# Altium PCB BPC_Clock.PcbDoc
Units mm, origin at the board's own origin, x right, y up, seen from the top; angles counter-clockwise.
Board outline 121.48 x 55.58 mm, 2 copper layers (Top Layer, Bottom Layer); 58 components, 97 nets, 349 pads, 138 vias.
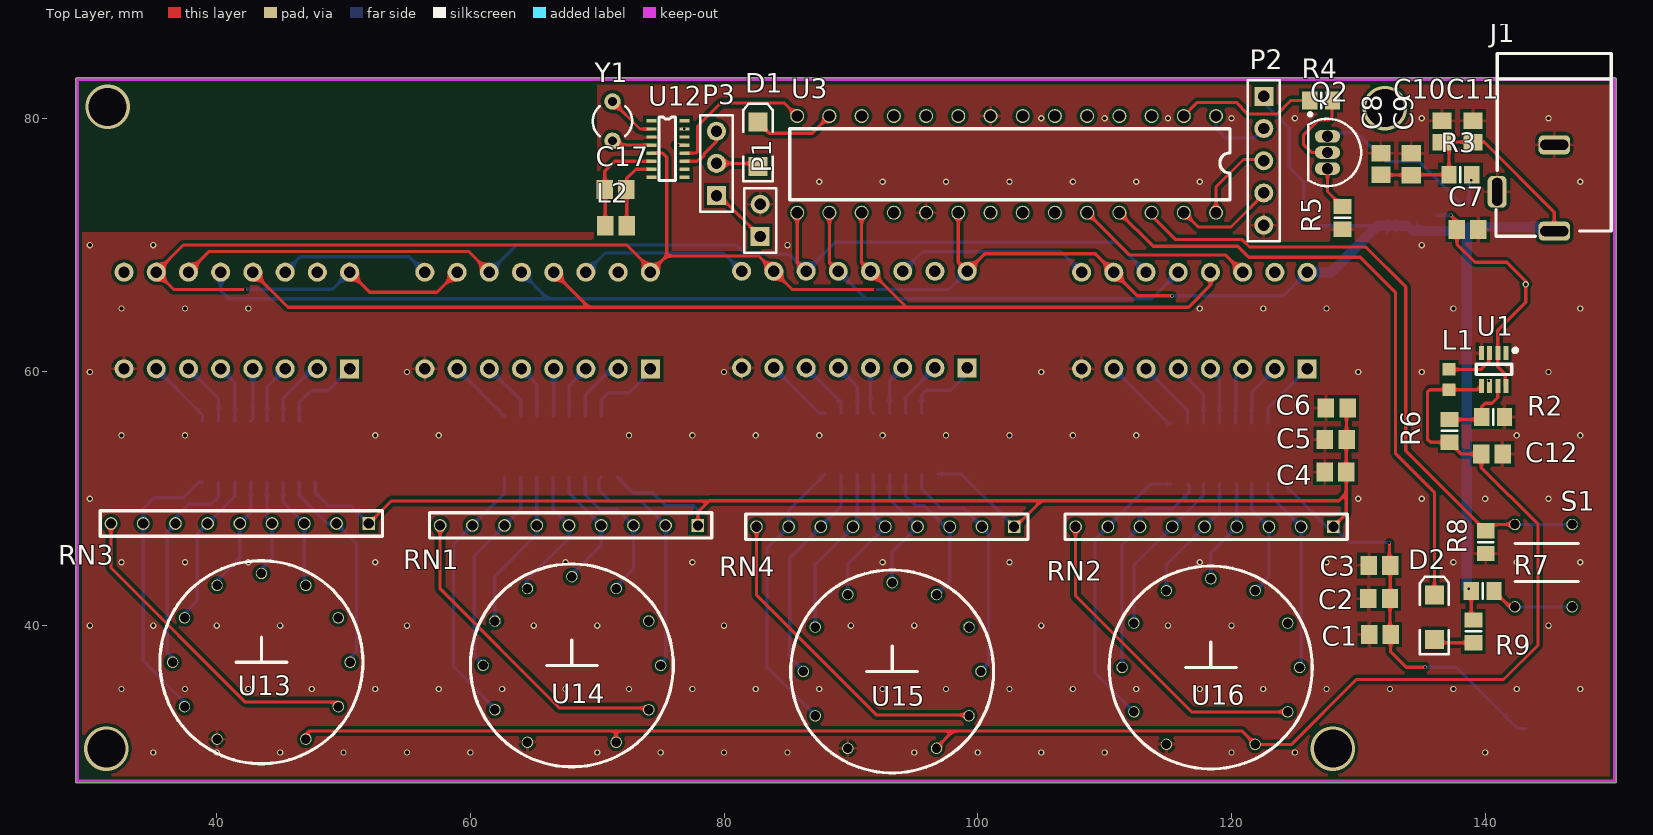
[diagram p0: Top Layer view]
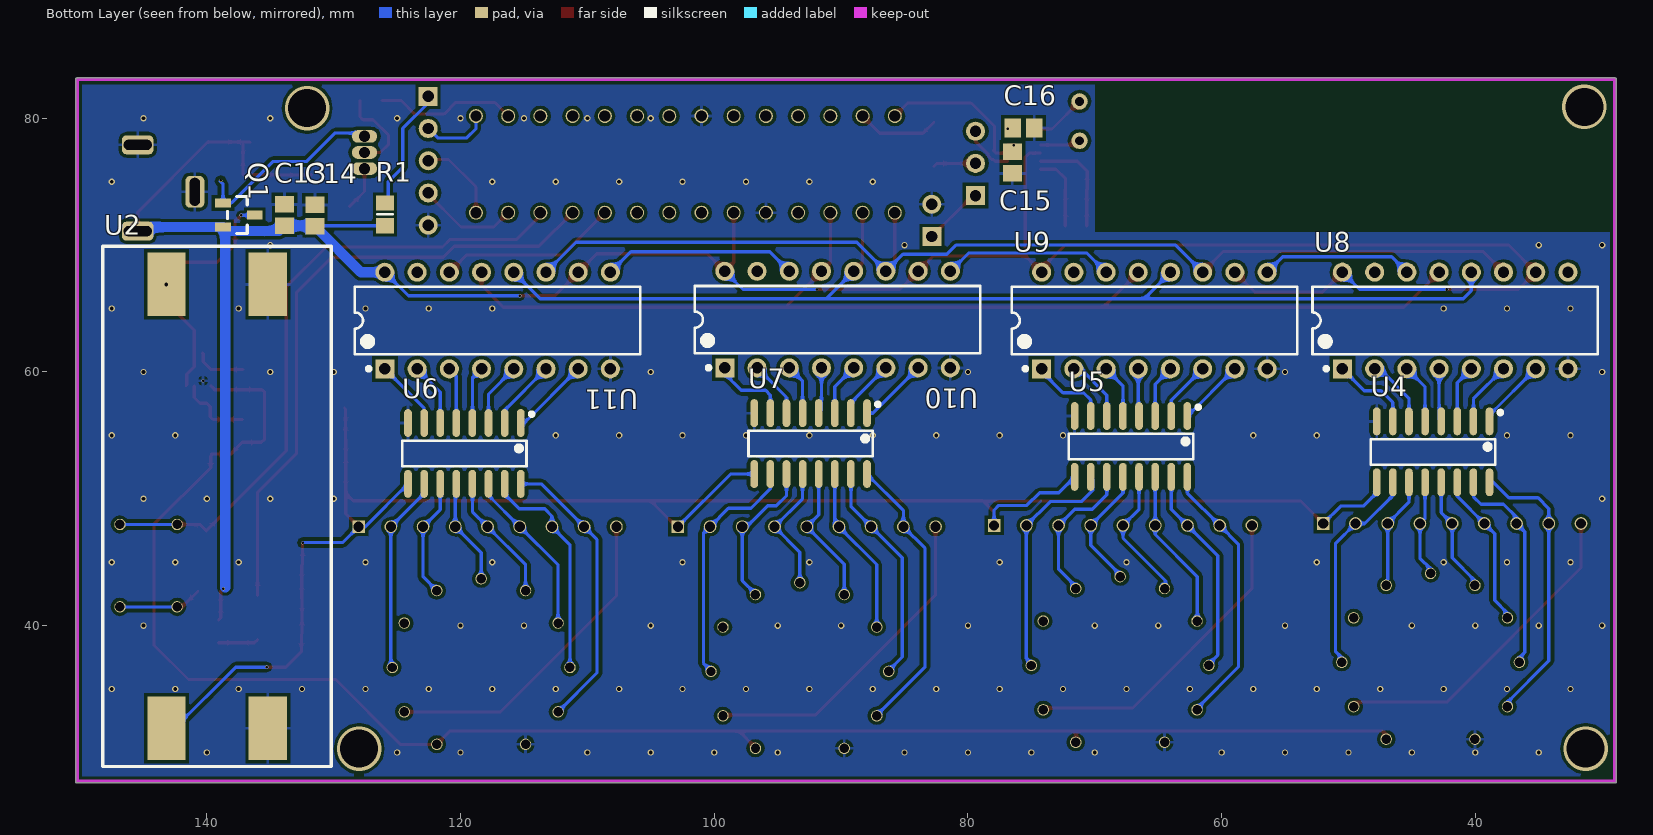
[diagram p1: Bottom Layer view, seen from below]

## Layer stack, top to bottom
Top Solder: solder mask 0.0102, Solder Resist, Dk 3.5
Top Layer: signal copper 0.0356
Dielectric 1: dielectric 0.32, FR-4, Dk 4.8
Bottom Layer: signal copper 0.0356
Bottom Solder: solder mask 0.0102, Solder Resist, Dk 3.5

## Board outline
28.873,27.725 ccw(c29,27.725) 29,27.598 150.225,27.598 ccw(c150.225,27.725) 150.352,27.725 150.352,83.05 ccw(c150.225,83.05) 150.187,83.172 ccw(c150.15,83.05) 150.15,83.177 29,83.177 ccw(c29,83.05) 28.873,83.05

## Design rules (kind name [scope] priority, off if disabled: settings)
Clearance [All] p1: gap=0.254
HoleToHoleClearance [All] p1: gap=0.1 allowstackedmicrovias=TRUE
MinimumSolderMaskSliver [All] p1: minsoldermaskwidth=0.01
PolygonConnect [All] p1: connectstyle=Relief reliefconductorwidth=0.254 reliefentries=4 polygonreliefangle="90 Angle" airgapwidth=0.254
RoomDefinition BPC_Clock [InComponentClass('BPC_Clock')] p1: confinementstyle=ConfineIn formatcopy=TRUE lockcomponents=FALSE outline 18.415,17.145 192.913,17.145 192.913,137.414 18.415,137.414
RoutingVias [All] p1: holewidth=0.711 width=1.27 viastyle="Through Hole" minholewidth=0.711 minwidth=1.27 maxholewidth=0.711 maxwidth=1.27
SilkToSilkClearance [All] p1: silktosilkclearance=0.01
SilkToSolderMaskClearance [IsPad] p1: minsilkscreentomaskgap=0.01 clearancetoexposedcopper=TRUE
SolderMaskExpansion [All] p1: expansion=0.102
Width [All] p1: maxlimit=0.8 minlimit=0.254 preferedwidth=0.254
26 further rules are at their usual default settings.

## Components (designator, comment, footprint, x,y, rotation, side; value= is the part's Value field where it differs from the comment)
C1 "Cap" CAPC2012N 131.7,39.3 r180 top
C2 "Cap" CAPC2012N 131.65,42.125 r180 top
C3 "Cap" CAPC2012N 131.675,44.75 r180 top
C4 "Cap" CAPC2012N 128.2,52.1 r180 top
C5 "Cap" CAPC2012N 128.225,54.675 r180 top
C6 "Cap" CAPC2012N 128.3,57.15 r180 top
C7 "Cap" CAPC2012N 138.625,71.225 r0 top
C8 "Cap" CAPC2012N 131.775,76.4 r90 top
C9 "Cap" CAPC2012N 134.175,76.375 r90 top
C10 "Cap" CAPC2012N 136.6,78.95 r90 top
C11 "Cap" CAPC2012N 139.05,78.95 r90 top
C12 "Cap" CAPC2012N 140.525,53.525 r0 top
C13 "Cap" CAPC2012N 133.875,72.375 r90 bottom
C14 "Cap" CAPC2012N 131.475,72.325 r90 bottom
C15 "Cap" CAPC2012N 76.5,76.5 r270 bottom
C16 "Cap" CAPC2012N 75.625,79.225 r180 bottom
C17 "Cap" CAPC2012N 71.45,74.4 r180 top
D1 "LED2" DSO-F2/D6.1 82.675,77.95 r90 top
D2 "LED State" DSO-F2/D6.1 136,40.65 r90 top
J1 "DC" DC 145.45,71.1 r90 top
L1 "Chip inductors" CAPC1608N 137.15,59.4 r90 top
L2 "Antenna" CAPC2012N 71.475,71.525 r180 top
P1 "Test code" HDR1X2 82.85,70.675 r90 top
P2 "Header 5" HDR1X5 122.55,81.73 r270 top
P3 "Jumper" HDR1X3 79.4,73.9 r90 top
Q1 "3415" LC-SOT-23(SOT-23-3) 137.475,72.375 r0 bottom
Q2 "NPN" BCY-W3 127.575,77.3 r180 top
R1 "0" "RES 0805N (2012)" 125.95,72.425 r270 bottom
R2 "80k" "RES 0805N (2012)" 140.625,56.45 r180 top
R3 "100k" "RES 0805N (2012)" 138.05,75.55 r0 top
R4 "10k" "RES 0805N (2012)" 127.075,81.4 r0 top
R5 "10k" "RES 0805N (2012)" 128.75,72.15 r90 top
R6 "120k" "RES 0805N (2012)" 137.2,55.35 r270 top
R7 "1k" "RES 0805N (2012)" 139.8,42.725 r180 top
R8 "2k" "RES 0805N (2012)" 140.05,46.575 r90 top
R9 "1k" "RES 0805N (2012)" 139.075,39.55 r90 top
RN1 "RN-9P" RN-9P 67.775,47.9 r270 top
RN2 "RN-9P" RN-9P 117.875,47.8 r270 top
RN3 "RN-9P" RN-9P 41.825,48.05 r270 top
RN4 "RN-9P" RN-9P 92.71,47.8 r270 top
S1 "Syn_button" sw 142.35,41.475 r90 top
U1 "MP2161" LC-TSOT-23-8 140.675,60.2 r180 top
U2 "MT3608" MT3608 143.2,31.9 r90 bottom
U3 "PIC16F1786" PIC-28 118.785,80.175 r270 top
U4 "ULN2003" LC-SOP-16_150mil 43.325,53.7 r0 bottom
U5 "ULN2003" LC-SOP-16_150mil 67.145,54.125 r0 bottom
U6 "ULN2003" LC-SOP-16_150mil 119.7,53.575 r0 bottom
U7 "ULN2003" LC-SOP-16_150mil 92.4,54.35 r0 bottom
U8 "74HC595" LC-DIP-16 41.584,64.058 r90 bottom
U9 "74HC595" LC-DIP-16 65.3,64.05 r90 bottom
U10 "74HC595" LC-DIP-16 90.275,64.125 r90 bottom
U11 "74HC595" LC-DIP-16 117.075,64.05 r90 bottom
U12 "CME6005" CME6005 74.275,79.79 r0 top
U13 "VFD" IV-11 43.525,37.112 r0 top
U14 "VFD" IV-11 68,36.862 r0 top
U15 "VFD" IV-11 93.25,36.387 r0 top
U16 "VFD" IV-11 118.375,36.7 r0 top
Y1 "XTAL" BCY-W2/D3.1 71.2,79.775 r0 top

## Footprints (in the part's own frame and the unit in brackets; to place one, negate y for a bottom-side part, rotate by r counter-clockwise, add the part's x,y. Pads: shape width x height; smd on the part's side, far side on the other; paste and mask are expansions set on the pad)
BCY-W2/D3.1 [mm] "Crystal, Thru-Hole; 2 Leads; Body 3.1 x 8.2 mm (Dia.xH)"
  round 1.3 hole 0.7: 1(0,1.55) 2(0,-1.55)
  silkscreen extent -1.55,-1.19 1.55,1.17
BCY-W3 [mm] "TO, Flat Index; 3 In-Line, Axial Leads; Body Dia. 4.8mm; Leads 0.55 x 0.51 mm (max)"
  oval 2x1 hole 0.9: 1(0,-1.27) 2(0,0) 3(0,1.27)
  silkscreen extent -2.65,-3.13 1.52,2.65, body extent -2.65,-2.66 1.52,2.66, height 5.33
CAPC1608N [mm] "Chip Capacitor, Body 1.6x0.8mm, IPC Medium Density"
  rect 1x1 smd: 1(-0.8,0) 2(0.8,0)
  body extent -0.87,-0.48 0.87,0.48, height 0.85
CAPC2012N [mm] "Chip Capacitor, Body 2.0x1.3mm, IPC Medium Density"
  rect 1.3x1.5 smd: 1(-0.85,0) 2(0.85,0)
  body extent -1.1,-0.72 1.1,0.72, height 1.1
CME6005 [mm]
  rect 0.8x0.27 smd: 1(0,0) 2(0,-0.635) 3(0,-1.27) 4(0,-1.905) 5(0,-2.54) 6(0,-3.175) 7(0,-3.81) 8(0,-4.445) 9(2.6,-4.445) 10(2.6,-3.81) 11(2.6,-3.175) 12(2.6,-2.54) 13(2.6,-1.905) 14(2.6,-1.27) 15(2.6,-0.635) 16(2.6,0)
  silkscreen extent 0.6,-4.7 1.9,0.3
DC [mm]
  rrect50% 1.5x2.5 hole 0.8 slot 2.2 at 90 deg: 1(0,0) 2(6.8,0)
  rrect50% 2.5x1.5 hole 0.8 slot 2.2 at 0 deg: 3(3.1,4.5)
  silkscreen extent -0.4,-4.5 14,4.6
DSO-F2/D6.1 [mm] "SMT LED; 2 Flat Leads"
  rect 1.5x1.5 smd: 1(-1.75,0) 2(1.75,0)
  silkscreen extent -2.9,-1.15 3.2,1.15
HDR1X2 [mm] "Connector; Header; 2 Position"
  rect 1.5x1.5 hole 0.9: 1(0,0)
  round 1.5 hole 0.9: 2(2.54,0)
  silkscreen extent -1.27,-1.27 3.81,1.27
HDR1X3 [mm] "Connector; Header; 3 Position"
  rect 1.5x1.5 hole 0.9: 1(0,0)
  round 1.5 hole 0.9: 2(2.54,0) 3(5.08,0)
  silkscreen extent -1.27,-1.27 6.35,1.27
HDR1X5 [mm] "Connector; Header; 5 Position"
  rect 1.5x1.5 hole 0.9: 1(0,0)
  round 1.5 hole 0.9: 2(2.54,0) 3(5.08,0) 4(7.62,0) 5(10.16,0)
  silkscreen extent -1.27,-1.27 11.43,1.27
IV-11 [mm]
  round 0.9 hole 0.73: 1(3.5,-6.062) 2(6.062,-3.5) 3(7,0)
  round 0.9 hole 0.75: 4(6.062,3.5) 5(3.5,6.062) 6(0,7) 7(-3.5,6.062) 8(-6.062,3.5) 9(-7,0) 10(-6.062,-3.5) 11(-3.5,-6.062)
  silkscreen extent -8,-8 8,8
LC-DIP-16 [mm]
  rect 1.5x1.5 hole 0.9: 1(-3.81,8.89)
  round 1.5 hole 0.9: 2(-3.81,6.35) 3(-3.81,3.81) 4(-3.81,1.27) 5(-3.81,-1.27) 6(-3.81,-3.81) 7(-3.81,-6.35) 8(-3.81,-8.89) 9(3.81,-8.89) 10(3.81,-6.35) 11(3.81,-3.81) 12(3.81,-1.27) 13(3.81,1.27) 14(3.81,3.81) 15(3.81,6.35) 16(3.81,8.89)
  silkscreen extent -3.95,-11.25 2.65,11.25
LC-SOP-16_150mil [mm]
  oval 0.6x2.2 smd: 1(-4.445,-2.4) 2(-3.175,-2.4) 3(-1.905,-2.4) 4(-0.635,-2.4) 5(0.635,-2.4) 6(1.905,-2.4) 7(3.175,-2.4) 8(4.445,-2.4) 9(4.445,2.4) 10(3.175,2.4) 11(1.905,2.4) 12(0.635,2.4) 13(-0.635,2.4) 14(-1.905,2.4) 15(-3.175,2.4) 16(-4.445,2.4)
  silkscreen extent -5.45,-3.25 4.9,1
LC-SOT-23(SOT-23-3) [mm]
  rect 1.25x0.7 smd: 1(1.25,-0.95) 2(-1.25,0) 3(1.25,0.95)
  silkscreen extent -0.65,-1.46 0.9,1.46, body extent -1.5,-1.5 1.5,1.5, height 1.3
LC-TSOT-23-8 [mm]
  rect 0.4x1.1 smd mask+0.051: 1(-0.975,-1.3) 2(-0.325,-1.3) 3(0.325,-1.3) 4(0.975,-1.3) 5(0.975,1.3) 6(0.325,1.3) 7(-0.325,1.3) 8(-0.975,1.3)
  silkscreen extent -1.85,-1.65 1.38,0.4
MT3608 [mm]
  rect 5x3 smd: 1(0,0) 2(0,-8) 3(35,0) 4(35,-8)
  silkscreen extent -3,-13 38,5
PIC-28 [mm]
  round 1.1 hole 0.9: 1(0,0) 2(0,-2.54) 3(0,-5.08) 4(0,-7.62) 5(0,-10.16) 6(0,-12.7) 7(0,-15.24) 8(0,-17.78) 9(0,-20.32) 10(0,-22.86) 11(0,-25.4) 12(0,-27.94) 13(0,-30.48) 14(0,-33.02) 15(7.62,-33.02) 16(7.62,-30.48) 17(7.62,-27.94) 18(7.62,-25.4) 19(7.62,-22.86) 20(7.62,-20.32) 21(7.62,-17.78) 22(7.62,-15.24) 23(7.62,-12.7) 24(7.62,-10.16) 25(7.62,-7.62) 26(7.62,-5.08) 27(7.62,-2.54) 28(7.62,0)
  silkscreen extent 1,-33.6 6.6,1.1
"RES 0805N (2012)" [mm] "Chip Resistor, Body 2.0x1.2mm, IPC Medium Density"
  rect 1.2x1.4 smd: 1(-0.9,0) 2(0.9,0)
  silkscreen extent 0,-0.6 0,0.6, body extent -1,-0.63 1,0.63, height 0.55
RN-9P [mm]
  rect 1x1 hole 0.8: 1(0,10.16)
  round 1 hole 0.8: 2(0,7.62) 3(0,5.08) 4(0,2.54) 5(0,0) 6(0,-2.54) 7(0,-5.08) 8(0,-7.62) 9(0,-10.16)
  silkscreen extent -1,-11 1,11.25
sw [mm]
  round 0.9 hole 0.75: 1(0,0) 1(0,-4.5) 2(6.5,-4.5) 2(6.5,0)
  silkscreen extent 2,-5 5,0

## Part data
C1 C2 C3 C4 C5 C6 C7 C8 C9 C10 C11 C12 C13 C14 C15 C16 C17: "Capacitor"
D1: "Typical RED, GREEN, YELLOW, AMBER GaAs LED"
D2: library part LED2, "Typical RED, GREEN, YELLOW, AMBER GaAs LED"
L2: library part Inductor, "Inductor"
P1: library part "Header 2", "Header, 2-Pin"
P2: "Header, 5-Pin"
P3: library part "Header 3", "Header, 3-Pin"
Q1: library part PMOS-2, "P-Channel Power MOSFET"
Q2: "NPN Bipolar Transistor"
R1 R2 R3 R4 R5 R6 R7 R8 R9: library part Res1, "Resistor"
S1: library part SW-PB, "Switch"
Y1: "Crystal Oscillator"

## Via types
v1: diameter 0.5, hole 0.3, Top Layer to Bottom Layer, 123 vias
v2: diameter 0.25, hole 0.2, Top Layer to Bottom Layer, 11 vias
v3: diameter 3.5, hole 3, Top Layer to Bottom Layer, 4 vias

## Nets (pads, with @x,y where several pads share a name; then routed paths per layer and width w, separated by ;. In a path a pad name is that pad's centre, name@x,y a point inside that pad or via, vN(x,y) a via of type N, cw(c..) or ccw(c..) an arc to the next point about the centre after c; other vN are vias at no path point)
BPC_CODE: P3.3 U12.11 | length 4.1
  Top Layer w0.254: U12.11 77.864,76.615 77.991,76.742 78.103,76.742 78.408,77.047 78.408,77.159 79.4,78.151 P3.3
BPC_DATA: D1.1 P3.2 | length 3.4
  Top Layer w0.254: P3.2 82.435,76.44 D1.1
BPC_ON: U3.14 U12.12 | length 12.2
  Top Layer w0.254: U12.12 77.767,77.25 77.992,77.475 77.9,77.475 77.9,79.35 79.75,81.2 84.74,81.2 U3.14
BPC_TEST: P1.1 P3.1 | length 5.1
  Top Layer w0.254: P3.1 79.91,73.39 79.91,73.615 P1.1
GND: C1.2 C2.2 C3.2 C4.2 C5.2 C6.2 C7.2 C8.2 C9.2 C10.2 C11.2 C12.2 C13.2 C14.2 C15.2 C16.2 J1.2 J1.3 P1.2 P2.5 R2.1 R5.1 R8.1 U1.4 U1.6 U2.2 U2.4 U3.8 U3.19 U4.8 U5.8 U6.8 U7.8 U8.8 U9.8 U10.8 U11.8 U12.3 U13.11 U14.11 U15.11 U16.11
  other v1: 35,30 40,30 45,30 50,30 55,30 60,30 70,30 75,30 80,30 85,30 95,30 100,30 105,30 110,30 120,30 125,30 140,30 32.5,35 37.5,35 42.5,35 47.5,35 52.5,35 57.5,35 62.5,35 67.5,35 72.5,35 77.5,35 82.5,35 87.5,35 92.5,35 97.5,35 102.5,35 107.5,35 112.5,35 117.5,35 122.5,35 127.5,35 132.5,35 137.5,35 142.5,35 147.5,35 30,40 35,40 40,40 45,40 55,40 65,40 70,40 80,40 90,40 95,40 105,40 115,40 120,40 145,40 32.5,45 37.5,45 42.5,45 52.5,45 67.5,45 77.5,45 92.5,45 102.5,45 117.5,45 127.5,45 137.5,45 142.5,45 147.5,45 30,50 130,50 135,50 140,50 145,50 32.5,55 37.5,55 52.5,55 57.5,55 72.5,55 77.5,55 82.5,55 87.5,55 92.5,55 97.5,55 102.5,55 107.5,55 112.5,55 142.5,55 147.5,55 30,60 55,60 80,60 105,60 130,60 135,60 145,60 32.5,65 37.5,65 42.5,65 117.5,65 122.5,65 127.5,65 137.5,65 147.5,65 30,70 35,70 85,70 135,70 87.5,75 92.5,75 97.5,75 102.5,75 107.5,75 112.5,75 117.5,75 147.5,75 105,80 110,80 115,80 120,80 125,80 135,80 145,80
  other v2: 140.3,59.3
LIGHT_ON: R4.1 U3.2 | length 11.2
  Top Layer w0.254: U3.2 117.32,81.25 120.375,81.25 121.3,80.325 123.6,80.325 124.675,81.4 R4.1
NetC15_1: C15.1 U12.13 | length 0.7
  Top Layer w0.254: 76.21,77.885 v2(76.4,77.885) U12.13
NetC16_1: C16.1 U12.15
  other v2: 76.875,79.155
NetC17_1: C17.1 L2.1 U12.7 | length 6
  Top Layer w0.254: L2.1 72.325,74.375 C17.1 72.3,75.225 73.055,75.98 U12.7
NetC17_2: C17.2 L2.2 U12.6 | length 8.3
  Top Layer w0.254: L2.2 70.625,74.375 C17.2 70.6,75.825 71.39,76.615 U12.6
NetD1_2: D1.2 U3.13 | length 6.6
  Top Layer w0.254: D1.2 83.55,78.825 86.955,78.825 U3.13
NetD2_1: D2.1 R9.1 | length 3.2
  Top Layer w0.254: D2.1 136.25,38.65 R9.1
NetL1_2: L1.2 U1.3 | length 4.1
  Top Layer w0.254: L1.2 139.689,60.2 140.281,60.792 140.281,61.431 U1.3
NetP2_1: P2.1 R1.1 | length 9.8
  Bottom Layer w0.254: P2.1 122.55,81.2 124.55,79.2 124.55,76.15 125.7,75 125.7,73.575 R1.1
NetQ1_1: Q1.1 Q2.1 R3.2 | length 16.1
  Bottom Layer w0.254: Q2.1@126.775,78.845 129.88,78.845 132.125,76.6 134.775,76.6 138.05,73.325 Q1.1 138.725,74.8 v2@138.975,75.05
  other v2: 138.9,75.1
NetQ2_2: Q2.2 R4.2 | length 7
  Top Layer w0.254: Q2.2 126.325,77.3 125.675,77.95 125.675,78.65 126.9,79.875 127.7,79.875 127.925,80.1 R4.2@127.925,81.4
NetQ2_3: Q2.3 R5.2 | length 3.5
  Top Layer w0.254: Q2.3 127.575,74.225 R5.2
NetR2_2: R2.2 R6.1 U1.7 | length 5.9
  Top Layer w0.254: R6.1 139.525,56.25 R2.2 139.725,57.25 140.006,57.531 140.544,57.531 141,57.987 U1.7
NetR7_1: R7.1 S1.1 | length 6.7
  Top Layer w0.254: R7.1 141.95,41.475 S1.1@142.35,41.475
  Bottom Layer w0.254: S1.1@142.35,41.475 S1.1@146.85,41.475
NetU4_1: U4.1 U8.7 | length 5.7
  Bottom Layer w0.254: U8.7 38.88,56.602 U4.1
NetU4_2: U4.2 U8.6 | length 5.1
  Bottom Layer w0.254: U8.6 40.15,57.872 U4.2
NetU4_3: U4.3 U8.5 | length 4.6
  Bottom Layer w0.254: U8.5 41.42,59.142 U4.3
NetU4_4: U4.4 U8.4 | length 4.2
  Bottom Layer w0.254: U4.4 42.854,56.264 U8.4
NetU4_5: U4.5 U8.3 | length 4.7
  Bottom Layer w0.254: U4.5 43.96,58.814 U8.3
NetU4_6: U4.6 U8.2 | length 5.5
  Bottom Layer w0.254: U4.6 45.23,57.93 47.548,60.248 U8.2
NetU4_7: U4.7 U8.1 | length 6.6
  Bottom Layer w0.254: U4.7 46.5,57.6 47.425,58.525 48.751,58.525 U8.1
NetU5_1: U5.1 U9.7 | length 5.3
  Bottom Layer w0.254: U9.7 62.665,56.525 U5.1
NetU5_2: U5.2 U9.6 | length 4.7
  Bottom Layer w0.254: U9.6 63.97,57.76 U5.2
NetU5_3: U5.3 U9.5 | length 4.2
  Bottom Layer w0.254: U9.5 65.24,59.03 U5.3
NetU5_4: U5.4 U9.4 | length 3.7
  Bottom Layer w0.254: U5.4 66.57,56.585 U9.4
NetU5_5: U5.5 U9.3 | length 4.3
  Bottom Layer w0.254: U5.5 67.78,58.91 U9.3
NetU5_6: U5.6 U9.2 | length 5.1
  Bottom Layer w0.254: U5.6 69.05,58.175 71.115,60.24 U9.2
NetU5_7: U5.7 U9.1 | length 6.2
  Bottom Layer w0.254: U5.7 70.32,57.795 70.889,58.364 72.514,58.364 U9.1@74.29,60.14
NetU6_1: U6.1 U11.7 | length 6.3
  Bottom Layer w0.254: U11.7 114.99,55.975 U6.1
NetU6_2: U6.2 U11.6 | length 5.6
  Bottom Layer w0.254: U11.6 116.525,56.98 U6.2
NetU6_3: U6.3 U11.5 | length 5.1
  Bottom Layer w0.254: U11.5 117.795,58.25 U6.3
NetU6_4: U6.4 U11.4 | length 4.6
  Bottom Layer w0.254: U11.4 119.065,59.52 U6.4
NetU6_5: U6.5 U11.3 | length 4.5
  Bottom Layer w0.254: U6.5 120.335,59.69 U11.3
NetU6_6: U6.6 U11.2 | length 5
  Bottom Layer w0.254: U6.6 121.605,58.42 U11.2
NetU6_7: U6.7 U11.1 | length 5.5
  Bottom Layer w0.254: U6.7 122.875,57.15 U11.1
NetU7_1: U7.1 U10.7 | length 5.5
  Bottom Layer w0.254: U10.7 87.49,56.75 U7.1
NetU7_2: U7.2 U10.6 | length 4.7
  Bottom Layer w0.254: U10.6 89.225,57.555 U7.2
NetU7_3: U7.3 U10.5 | length 4.2
  Bottom Layer w0.254: U10.5 90.495,58.825 U7.3
NetU7_4: U7.4 U10.4 | length 3.7
  Bottom Layer w0.254: U10.4 91.545,56.97 U7.4
NetU7_5: U7.5 U10.3 | length 4
  Bottom Layer w0.254: U7.5 93.035,59.265 U10.3
NetU7_6: U7.6 U10.2 | length 4.5
  Bottom Layer w0.254: U7.6 94.305,57.995 U10.2
NetU7_7: U7.7 U10.1 | length 6.2
  Bottom Layer w0.254: U7.7 95.575,58.175 95.95,58.55 97.875,58.55 99.165,59.84 U10.1
NetU8_14: U8.14 U9.9 | length 12
  Bottom Layer w0.254: U8.14 46.601,69.075 55.195,69.075 U9.9
NetU9_14: U9.14 U10.9 | length 13.5
  Bottom Layer w0.254: U9.14 70.625,69.375 79.945,69.375 U10.9
NetU10_14: U10.14 U11.9 | length 15.4
  Bottom Layer w0.254: U10.14 95.625,69.475 106.57,69.475 U11.9
NetU12_2: U12.2 Y1.1 | length 4
  Top Layer w0.254: Y1.1 73.37,79.155 U12.2
NetU12_4: U12.4 Y1.2 | length 3.2
  Top Layer w0.254: Y1.2 71.54,77.885 U12.4
PIC_CLK: P2.4 U3.27 | length 8.1
  Top Layer w0.254: U3.27 117.375,71.425 119.965,71.425 P2.4@122.75,74.21
PIC_DA: P2.3 U3.28 | length 6.9
  Top Layer w0.254: U3.28 118.785,74.585 120.95,76.75 P2.3@122.75,76.75
PIC_DATA: U3.24 U11.14 | length 14.2
  Top Layer w0.254: U3.24 111.955,69.225 119.52,69.225 U11.14
PIC_OE: U3.17 U8.13 U9.13 U10.13 U11.13 | length 91.2
  Top Layer w0.254: U8.13 45.622,65.1 69.33,65.1 ; U9.13 69.33,65.1 ; U3.17 90.845,68.635 U10.13 94.38,65.1 ; U11.13 118.345,66.82 116.625,65.1 94.38,65.1 ; 69.33,65.1 94.38,65.1
PIC_SHCP: U3.15 U8.11 U9.11 U10.11 U11.11 | length 85.4
  Top Layer w0.254: U8.11 39.405,69.499 59.851,69.499 U9.11 ; U3.15 85.765,68.635 U10.11
  Bottom Layer w0.254: U9.11 63.63,70 80.95,70 81.675,69.275 85.125,69.275 U10.11 88.755,70.225 110.9,70.225 U11.11
PIC_STCP: U3.16 U8.12 U9.12 U10.12 U11.12 | length 88.9
  Top Layer w0.254: U3.16 88.305,68.635 U10.12
  Bottom Layer w0.254: U8.12 40.314,66.411 40.95,65.775 66.115,65.775 ; U9.12 66.115,65.775 ; U10.12 91.133,65.808 ; U11.12 113.72,65.775 66.115,65.775
PIC_VPP: P2.2 U3.1 | length 5.4
  Bottom Layer w0.254: U3.1 118.785,79.165 119.5,78.45 121.81,78.45 P2.2
STATE: D2.2 U3.25 | length 49.5
  Top Layer w0.254: U3.25 113.82,69.9 120.5,69.9 121.35,69.05 130.15,69.05 132.925,66.275 132.925,53.575 136,50.5 D2.2
SYN: R8.2 S1.2 U3.26 | length 51.4
  Top Layer w0.254: U3.26 113.705,72.32 115.575,70.45 120.825,70.45 121.425,69.85 130.6,69.85 133.75,66.7 133.75,53.775 R8.2 140.55,47.975 S1.2@142.35,47.975
  Bottom Layer w0.254: S1.2@142.35,47.975 S1.2@146.85,47.975
VCC: C8.1 C9.1 C10.1 C11.1 C13.1 C14.1 J1.1 Q1.3 R1.2 R3.1 R7.2 R9.2 U3.20 U8.10 U8.16 U9.10 U9.16 U10.10 U10.16 U11.10 U11.16 U12.5 | length 215.9
  Top Layer w0.254: v2(42.25,66.5) 36.602,66.5 U8.10 37.373,70.007 72.318,70.007 U9.16@74.327,67.997 ; U8.16 52.067,66.275 57.365,66.275 U9.10 ; U9.16 U9.16@74.327,67.997 ; U12.5 75.15,77.25 75.475,76.925 75.475,69.145 ; v2(91.9,66.5) 85.36,66.5 U10.10 82.715,69.145 75.475,69.145 ; U3.20 98.465,68.635 U10.16 100.555,69.325 109.26,69.325 U11.10 112.585,66 v2(115.325,66) ; C8.1 131.8,75.525 C9.1 C9.1@134.475,75.225 ; C9.1@134.6,75.55 R3.1 C10.1@137.15,78.125 ; C10.1 136.625,78.125 C10.1@137.15,78.125 ; R7.2 138.9,40.625 R9.2 ; J1.1 145.45,72.6 139.925,78.125 C10.1@137.15,78.125 ; U9.16@74.327,67.997 75.475,69.145
  Bottom Layer w0.254: v2@42.25,66.525 49.131,66.525 U8.16 ; v2(91.9,66.5) 97.73,66.5 U10.16 ; v2(115.325,66) 124.105,66 U11.16 ; R1.2 131.525,71.525 C14.1 ; C13.1 C13.1@134.3,71.1 ; Q1.3@138.55,71.25 Q1.3
  Bottom Layer w0.8: U11.16 127.86,67.86 C14.1 ; C14.1@131.525,71.525 C13.1 ; C13.1@134.3,71.1 138.4,71.1 138.55,71.25 138.55,43.025 ; Q1.3 145.125,71.425 J1.1
  other v2: 138.7,42.9
VCC_LIGHT: C7.1 Q1.2 U1.2 U1.8 U2.3 | length 19.6
  Top Layer w0.254: v2(137.3,72.35) 137.775,71.875 C7.1 137.775,70.075 139.2,68.65 141.7,68.65 143.2,67.15 v1(143.2,66.9) 143.2,65.5 141,63.3 U1.2 141,60.412 141.581,59.831 141.581,58.969 U1.8
  Bottom Layer w0.254: Q1.2 136.25,72.35 v2(137.3,72.35)
VH: C1.1 C2.1 C3.1 C4.1 C5.1 C6.1 RN1.1 RN2.1 RN3.1 RN4.1 U2.1 U4.9 U5.9 U6.9 U7.9 | length 147.6
  Top Layer w0.254: RN3.1 53.76,49.825 78.825,49.825 ; RN1.1 77.935,48.935 78.825,49.825 ; RN4.1 102.975,47.8 105.025,49.85 ; RN2.1 129.05,48.815 129.05,50.425 ; C6.1 129.075,57.075 C5.1 129.05,54.65 C4.1 129.05,50.425 ; v2(132.45,46.525) 132.45,44.825 C3.1 132.525,42.15 C2.1 132.5,39.35 C1.1 132.55,37.95 133.775,36.725 v2(135.275,36.725) ; 78.825,49.825 78.85,49.85 105.025,49.85 ; 105.025,49.85 128.475,49.85 129.05,50.425
  Bottom Layer w0.254: U4.9 47.77,50.48 48.825,49.425 50.61,49.425 RN3.1 ; U5.9 72.84,50.475 74.35,50.475 75.35,49.475 77.575,49.475 77.935,49.115 RN1.1 ; U7.9 98.72,51.95 RN4.1 ; U6.9 127.52,47.8 RN2.1 129.285,46.55 v2@132.45,46.55 ; v2(135.275,36.725) 137.725,36.725 142.55,31.9 U2.1
VL: C12.1 L1.1 R6.2 U1.5 U13.1 U14.1 U15.1 U16.1 | length 133.4
  Top Layer w0.254: U13.1@47.025,31.413 47.312,31.7 71.475,31.7 ; U14.1@71.475,30.938 71.475,31.7 ; U15.1@96.75,30.388 98.062,31.7 ; C12.1 C12.1@139.525,53.525 ; U1.5 139.4,58.6 L1.1 135.65,58.6 135.45,58.4 135.45,54.7 135.7,54.45 R6.2 138.125,53.525 C12.1@139.525,53.525 ; 71.475,31.7 98.062,31.7 ; 98.062,31.7 120.813,31.7 U16.1 124.738,30.638 129.85,35.75 141.45,35.75 144.175,38.475 144.175,47.975 139.7,52.45 139.7,53.35 C12.1@139.525,53.525
Y1: RN3.9 U13.2 | length 25.8
  Top Layer w0.254: RN3.9 31.665,44.56 42.25,33.975 U13.2@49.587,33.975
Y1A: RN3.2 U4.10 U13.3 | length 16.3
  Bottom Layer w0.254: U4.10 46.5,50.25 48.7,48.05 RN3.2 51.025,46.47 51.025,37.975 U13.3@50.525,37.475
Y1B: RN3.3 U4.11 U13.5 | length 8.5
  Bottom Layer w0.254: U4.11 45.23,49.725 RN3.3 46.905,43.657 U13.5@47.025,43.537
Y1C: RN3.4 U4.12 U13.6 | length 7.3
  Bottom Layer w0.254: U13.6@43.525,44.475 44.365,45.315 RN3.4 43.96,48.455 U4.12
Y1D: RN3.5 U4.13 U13.7 | length 8.9
  Bottom Layer w0.254: U13.7@40.025,43.537 41.825,45.337 RN3.5 42.69,48.915 U4.13
Y1E: RN3.6 U4.14 U13.8 | length 12
  Bottom Layer w0.254: U13.8@37.463,40.975 38.475,41.987 38.475,47.24 RN3.6 41.42,50.185 U4.14
Y1F: RN3.7 U4.15 U13.9 | length 16.7
  Bottom Layer w0.254: U13.9@36.525,37.475 36.1,37.9 36.1,47.405 RN3.7 36.745,48.545 37.775,49.575 39.55,49.575 40.15,50.175 U4.15
Y1G: RN3.8 U4.16 U13.10 | length 22.1
  Bottom Layer w0.254: U13.10@37.463,33.975 34.205,37.233 RN3.8 34.205,49.23 35.05,50.075 37.35,50.075 38.575,51.3 U4.16
Y2: RN1.9 U14.2 | length 25.3
  Top Layer w0.254: RN1.9 57.615,42.91 67.025,33.5 U14.2@74.037,33.5
Y2A: RN1.2 U5.10 U14.3 | length 18.6
  Bottom Layer w0.254: U5.10 70.15,51.555 70.15,50.675 71.05,49.775 73.52,49.775 RN1.2 75.395,37.42 U14.3@74.975,37
Y2B: RN1.3 U5.11 U14.5 | length 11.6
  Bottom Layer w0.254: U5.11 69.05,50.325 70.2,49.175 71.58,49.175 RN1.3 72.855,44.442 U14.5@71.475,43.062
Y2C: RN1.4 U5.12 U14.6 | length 9.7
  Bottom Layer w0.254: U5.12 67.78,50.435 RN1.4 70.315,46.34 U14.6@67.975,44
Y2D: RN1.5 U5.13 U14.7 | length 11
  Bottom Layer w0.254: U14.7@64.703,43.291 64.425,43.012 64.425,43.55 67.775,46.9 RN1.5 66.51,49.165 U5.13
Y2E: RN1.6 U5.14 U14.8 | length 12.6
  Bottom Layer w0.254: U14.8@61.913,40.5 61.913,43.863 65.235,47.185 RN1.6 65.24,47.905 U5.14
Y2F: RN1.7 U5.15 U14.9 | length 16.5
  Bottom Layer w0.254: U14.9@60.975,37 60.3,37.675 60.3,45.505 RN1.7 63.97,49.175 U5.15
Y2G: RN1.8 U5.16 U14.10 | length 21.2
  Bottom Layer w0.254: U14.10@61.913,33.5 58.675,36.738 58.675,46.42 RN1.8 62.7,50.445 U5.16
Y3: RN4.9 U15.2 | length 26.1
  Top Layer w0.254: RN4.9 82.55,42.425 92.025,32.95 U15.2@99.312,32.95
Y3A: RN4.2 U7.10 U15.3 | length 19
  Bottom Layer w0.254: U7.10 95.575,50.775 97.1,49.25 98.88,49.25 RN4.2 100.85,47.28 100.85,37.05 U15.3@100.25,36.45
Y3B: RN4.3 U7.11 U15.5 | length 11.9
  Bottom Layer w0.254: U7.11 94.305,50.245 95.1,49.45 95.775,49.45 97.425,47.8 RN4.3 97.79,43.552 U15.5@96.75,42.512
Y3C: RN4.4 U7.12 U15.6 | length 10.2
  Bottom Layer w0.254: U7.12 93.035,50.015 RN4.4 93.25,45.8 U15.6@93.25,43.45
Y3D: RN4.5 U7.13 U15.7 | length 11.1
  Bottom Layer w0.254: U15.7@89.75,42.512 89.75,44.84 RN4.5 91.765,48.745 U7.13
Y3E: RN4.6 U7.14 U15.8 | length 13.4
  Bottom Layer w0.254: U15.8@87.188,39.95 87.188,44.818 RN4.6 90.495,48.125 U7.14
Y3F: RN4.7 U7.15 U15.9 | length 17.6
  Bottom Layer w0.254: U15.9@86.25,36.45 85.175,37.525 85.175,45.345 RN4.7 89.225,49.395 U7.15
Y3G: RN4.8 U7.16 U15.10 | length 22.5
  Bottom Layer w0.254: U15.10@87.188,32.95 83.375,36.763 83.375,46.085 RN4.8 85.09,49.085 U7.16
Y4: RN2.9 U16.2 | length 26
  Top Layer w0.254: RN2.9 107.715,42.335 116.85,33.2 U16.2
Y4A: RN2.2 U6.10 U16.3 | length 15.6
  Bottom Layer w0.254: U6.10 122.875,50.42 RN2.2 125.495,36.82 U16.3
Y4B: RN2.3 U6.11 U16.5 | length 9.4
  Bottom Layer w0.254: U6.11 121.605,49.15 RN2.3 122.955,43.842 U16.5
Y4C: RN2.4 U6.12 U16.6 | length 8.4
  Bottom Layer w0.254: U16.6 118.375,45.76 RN2.4 120.415,51.095 U6.12
Y4D: RN2.5 U6.13 U16.7 | length 10.1
  Bottom Layer w0.254: U16.7 114.875,44.8 RN2.5 119.065,48.99 U6.13
Y4E: RN2.6 U6.14 U16.8 | length 13.2
  Bottom Layer w0.254: U16.8 112.313,44.778 RN2.6 117.795,50.26 U6.14
Y4F: RN2.7 U6.15 U16.9 | length 17.9
  Bottom Layer w0.254: U16.9 111.375,46.38 RN2.7 112.795,48.645 113.361,49.211 115.386,49.211 116.675,50.5 116.675,51.025 U6.15
Y4G: RN2.8 U6.16 U16.10 | length 22.7
  Bottom Layer w0.254: U16.10 109.25,36.263 109.25,46.795 RN2.8 113.63,51.175 U6.16
pads on no net: U1.1 U3.3 U3.4 U3.5 U3.6 U3.7 U3.9 U3.10 U3.11 U3.12 U3.18 U3.21 U3.22 U3.23 U8.9 U8.15 U9.15 U10.15 U11.15 U12.1 U12.8 U12.9 U12.10 U12.14 U12.16 U13.4 U14.4 U15.4 U16.4
copper on no net:
  other v3: 31.3,30.3 128,30.3 132.1,80.8 31.4,80.9

## Polygon pours and split planes (outlines as drawn)
GND on Bottom Layer "BGND" (solid, remove dead copper, pour order 30): 70,83 150,83 150,27.725 29,27.725 29,71 70,71
GND on Top Layer "TGND" (solid, remove dead copper, pour order 32): 70,83 150,83 150,28 29,28 29,71 70,71

## Keep-outs
Keep-Out Layer:
  lines w0.254: 150.15,83.05 29,83.05 29,27.725 150.225,27.725 150.225,83.05